# Altium PCB Breakout.PcbDoc
Units mil, origin at the board's own origin, x right, y up, seen from the top; angles counter-clockwise.
Board outline 1380 x 2410 mil, 2 copper layers (Top Layer, Bottom Layer); 51 components, 48 nets, 259 pads, 19 vias.
Unrouted connection lines stored in the file: 30.
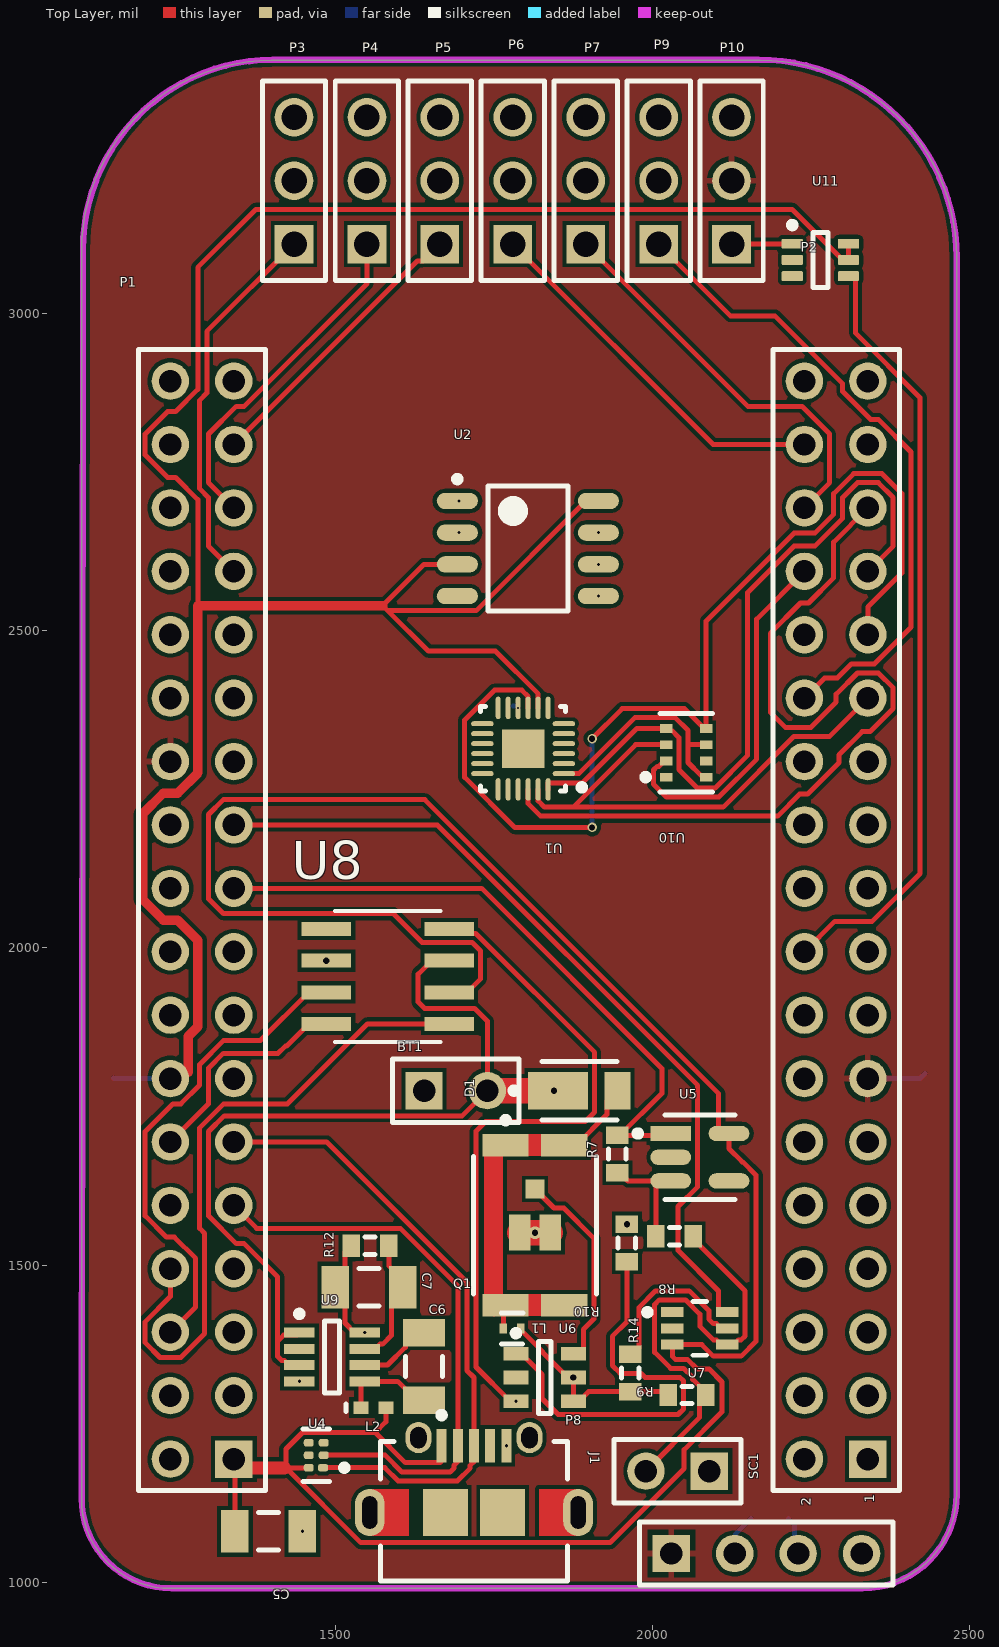
[diagram p0: Top Layer view]
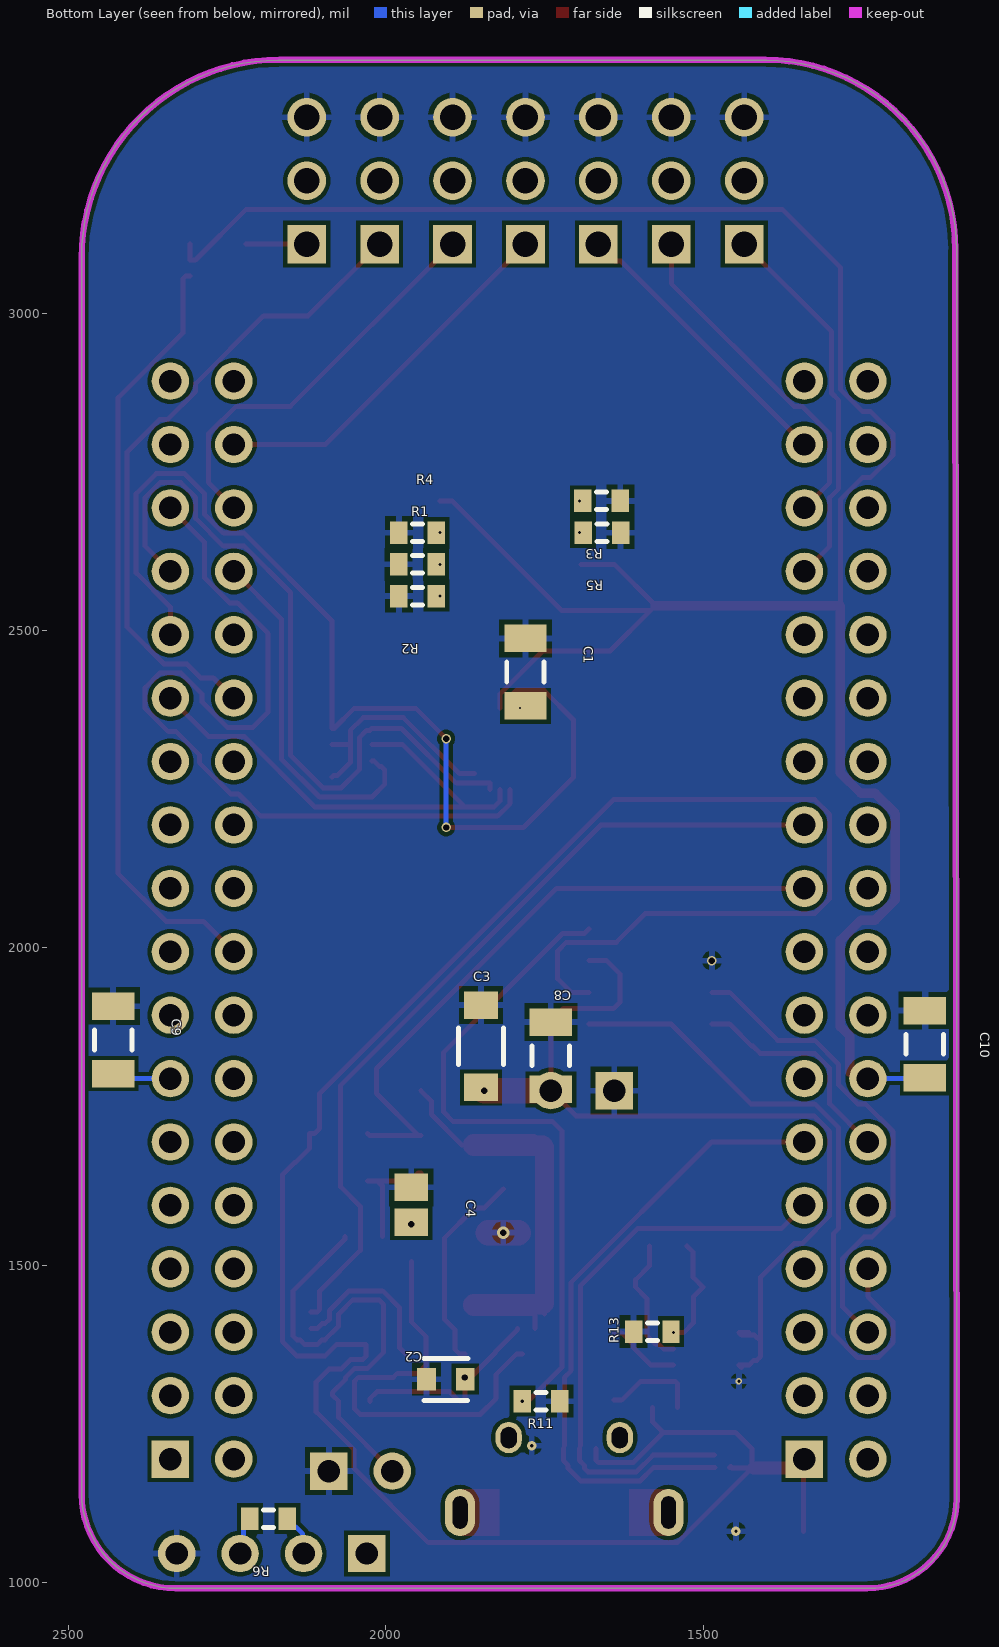
[diagram p1: Bottom Layer view, seen from below]

## Layer stack, top to bottom
Top Solder: solder mask 0.4, Solder Resist, Dk 3.5
Top Layer: signal copper 1.4
Dielectric 1: dielectric 12.6, FR-4, Dk 4.8
Bottom Layer: signal copper 1.4
Bottom Solder: solder mask 0.4, Solder Resist, Dk 3.5

## Board outline
1400,3400 2170,3400 cw(c2170,3090) 2480,3090 2480,1140 cw(c2330,1140) 2330,990 1240,990 cw(c1240,1130) 1100,1130 1100,3100 cw(c1400,3100)

## Design rules (kind name [scope] priority, off if disabled: settings)
BoardOutlineClearance BoardOutlineClearance_2 [All] p1: gap=0 ignorepadtopadclearanceinfootprint=FALSE
BoardOutlineClearance BoardOutlineClearance_1 [OnLayer('Bottom Overlay')] p2: gap=0 ignorepadtopadclearanceinfootprint=FALSE
BoardOutlineClearance [OnLayer('Top Overlay')] p3: gap=0 ignorepadtopadclearanceinfootprint=FALSE
Clearance [All] p1: gap=6.3 ignorepadtopadclearanceinfootprint=FALSE
HoleSize [All] p1: absolutevalues=TRUE maxlimit=248.03 minlimit=12.6 maxpercent=80.000 minpercent=20.000
HoleToHoleClearance [All] p1: gap=5.91 allowstackedmicrovias=TRUE
MinimumAnnularRing [All] p1: minimumring=5.91
MinimumSolderMaskSliver [All] p1: minsoldermaskwidth=5.91
PlaneConnect [All] p1: planeconnectstyle=Direct reliefexpansion=20 reliefentries=4 reliefconductorwidth=10 reliefairgap=10
PolygonConnect [All] p1: connectstyle=Relief reliefconductorwidth=9.84 reliefentries=4 polygonreliefangle="90 Angle" airgapwidth=7.87
RoutingVias [All] p1: holewidth=12.6 width=19.68 viastyle="Through Hole" minholewidth=12.6 minwidth=19.68 maxholewidth=248.03 maxwidth=496.06
SMDEntry [All] p1: side=TRUE corner=TRUE anyangle=TRUE
SilkToSilkClearance [All] p1: silktosilkclearance=5.91
SilkToSolderMaskClearance [IsPad] p1: minsilkscreentomaskgap=5.91 clearancetoexposedcopper=TRUE
SolderMaskExpansion [All] p1: expansion=4 istentingtop=FALSE
UnConnectedPin [All] p1:
UnRoutedNet [All] p1: checkbadconnections=TRUE
Width [All] p1: maxlimit=393.7 minlimit=6.3 preferedwidth=7.87
23 further rules are at their usual default settings.

## Classes and differential pairs
component class "5v and Filters": BT1 C5 C6 C7 C8 C9 C10 L2 R12 R13 U9
component class MPPT: C2 C3 C4 D1 L1 Q1 R7 R8 R9 R10 R11 R14 SC1 U5 U6 U7 U8
component class PocketPilot: C1 J1 P1 P2 P3 P4 P5 P6 P7 P8 P9 P10 R1 R2 R3 R4 R5 U1 U2 U4 U10 U11

## Components (designator, comment, footprint, x,y, rotation, side; value= is the part's Value field where it differs from the comment)
BT1 "Battery" BAT-2 1690,1775 r0 top
C1 "Cap Semi" C1206 1780,2435 r270 bottom value=0.1uF
C2 "GRM188R61A106KE69D" FP-GRM18-0_15-MFG 1905.51,1320 r0 bottom value=10uF
C3 "C3216X5R1E476M160AC" FP-C3216-160-MFG 1850,1845 r90 bottom value=47uF
C4 "C0805C221K5RACTU" CAPC2013X88X50LL20T25 1960,1595 r270 bottom
C5 "Cap Semi" C1206 1395,1080 r180 top value=1uF
C6 "Cap Semi" C1206 1640,1340 r270 top value=0.22uF
C7 "Cap Semi" C1206 1553.15,1465 r180 top value=0.22pF
C8 "Cap Semi" C1206 1740,1830 r90 bottom value=2.2uF
C9 "Cap Semi" C1206 2430,1855 r270 bottom value=1uF
C10 "Cap Semi" C1206 1150,1848.15 r270 bottom value=10nF
D1 "DFLS220L-7" FP-PowerDI123-MFG 1885,1775 r180 top value=75pF
J1 "47589-0001" MOLX-47589-0001_V 1718.82,1168.74 r0 top
L1 "LQW04AN33NH00D" FP-LQW04AN_00-MFG 1778.78,1400 r180 top
L2 "Inductor" 0402-A 1560,1275 r0 top value=33uH
P1 "Header 18X2" HDR2X18 1340,1194 r90 top
P2 "Header 18X2" HDR2X18 2340,1194 r90 top
P3 "TSW-103-07-G-S" SMTC-TSW-103-07-X-S 1435,3110 r90 top
P4 "TSW-103-07-G-S" SMTC-TSW-103-07-X-S 1550,3110 r90 top
P5 "TSW-103-07-G-S" SMTC-TSW-103-07-X-S 1665,3110 r90 top
P6 "TSW-103-07-G-S" SMTC-TSW-103-07-X-S 1780,3110 r90 top
P7 "TSW-103-07-G-S" SMTC-TSW-103-07-X-S 1895,3110 r90 top
P8 "Header 4" HDR1X4 2030,1045 r0 top
P9 "TSW-103-07-G-S" SMTC-TSW-103-07-X-S 2010,3110 r90 top
P10 "TSW-103-07-G-S" SMTC-TSW-103-07-X-S 2125,3110 r90 top
Q1 "BSB012N03LX3 G" INF-MG-WDSON-2-8_V 1815,1562.91 r0 top
R1 "Res3" J1-0603 1950.47,2605 r180 bottom value=1.5K
R2 "Res3" J1-0603 1950,2555 r0 bottom value=1.5K
R3 "Res3" J1-0603 1660,2705 r0 bottom value=1K
R4 "Res3" J1-0603 1950,2655 r180 bottom value=1K
R5 "Res3" J1-0603 1659.53,2655 r0 bottom value=1K
R6 "Res3" J1-0603 2185,1100 r0 bottom value=120
R7 "Res3" J1-0603 1945,1675 r90 top value=2.5K
R8 "Res3" J1-0603 2035,1545 r180 top value=7K
R9 "Res3" J1-0603 2055,1295 r180 top value=1
R10 "Res3" J1-0603 1960,1535 r270 top value=147K
R11 "Res3" J1-0603 1755.47,1285.2 r0 bottom value=1K
R12 "Res3" J1-0603 1555,1530 r180 top value=604K
R13 "Res3" J1-0603 1580,1395 r0 bottom value=200K
R14 "Res3" J1-0603 1965,1330 r270 top value=1
SC1 "Solar Cells" BAT-2 2040,1175 r180 top
U1 "MPU-9250" INSE-QFN-24-1700X1540TP_M 1796.38,2314.25 r180 top
U2 "CAT24C32WI-GT3" ONSC-SOIC-8-751BD-01_M 1803.78,2630 r0 top
U4 "TPD4S012DRYR" FP-DRY0006A-MFG 1470,1200 r180 top
U5 "MCP6001T-I/OT" FP-C04-091-OT-IPC_A 2075,1670 r0 top
U6 "LTC1872BES6#TRMPBF" LT-S6-6-TSOT-23_L 1830.28,1322.6 r0 top
U7 "INA214AIDCKT" FP-DCK0006A-MFG 2075,1400 r0 top
U8 "AD8400ARZ1" R_8_ADI 1583,1955 r0 top
U9 "LT3470ITS8" LT-TS8-8-TSOT-23_V 1495,1355 r0 top
U10 "BMP280" FP-BMP280-MFG 2053.5,2307.8 r180 top
U11 "SN74LVC1G57DCKR" DCK0006A_N 2265,3085 r0 top

## Footprints (in the part's own frame and the unit in brackets; to place one, negate y for a bottom-side part, rotate by r counter-clockwise, add the part's x,y. Pads: shape width x height; smd on the part's side, far side on the other; paste and mask are expansions set on the pad)
0402-A [mm] "Chip Inductor, Body 1.0x0.5mm, IPC High Density"
  rect 0.6x0.5 smd: 1(-0.5,0) 2(0.5,0)
  silkscreen extent -1.1,-0.15 -1.1,0.15, body extent -0.55,-0.3 0.55,0.3, height 0.55
BAT-2 [mm] "Battery; 2 Leads"
  rect 1.5x1.5 hole 0.9: 1(-1.27,0)
  round 1.5 hole 0.9: 2(1.27,0)
  silkscreen extent -2.54,-1.27 2.54,1.27
C1206 [mm] "Chip Capacitor, Body 3.2x1.6mm, IPC High Density"
  rect 1.1x1.7 smd: 1(-1.35,0) 2(1.35,0)
  silkscreen extent -0.4,-0.75 0.4,0.75, body extent -1.7,-0.9 1.7,0.9, height 1.3
CAPC2013X88X50LL20T25 [mm] "Chip Capacitor, 2-Leads, Body 2.00x1.25mm, IPC High Density"
  rect 1.1x1.35 smd: 1(-0.7,0) 2(0.7,0)
  body extent -1.1,-0.72 1.1,0.72, height 0.88
DCK0006A_N [mm] "SOT23, 6-Leads, Body 2.15x1.4mm, Pitch 0.65mm, IPC Medium Density"
  rrect25% 0.85x0.4 smd: 1(-1.125,0.65) 2(-1.125,0) 3(-1.125,-0.65) 4(1.125,-0.65) 5(1.125,0) 6(1.125,0.65)
  silkscreen extent -1.25,-1.1 0.3,1.52, body extent -1.14,-1 1.14,1, height 0.94
FP-BMP280-MFG [mm]
  rect 0.5x0.35 smd paste+0 mask+0: 1(0.8,0.975) 2(0.8,0.325) 3(0.8,-0.325) 4(0.8,-0.975) 5(-0.8,-0.975) 6(-0.8,-0.325) 7(-0.8,0.325) 8(-0.8,0.975)
  silkscreen extent -1.05,-1.58 1.75,1.58, body extent -1.55,-1.8 1.55,1.8, height 0.25
FP-C04-091-OT-IPC_A [mil]
  rect 64.5x24.33 smd paste+0 mask+0: 1(-45.91,37.4)
  rrect100% 64.5x24.33 smd paste+0 mask+0: 2(-45.91,0) 3(-45.91,-37.4) 4(45.91,-37.4) 5(45.91,37.4)
  silkscreen extent -103,-67 55,67
FP-C3216-160-MFG [mm]
  rect 1.1x1.35 smd paste+0 mask+0: 1(-1.65,0) 2(1.65,0)
  silkscreen extent -0.72,-0.9 0.72,0.9, body extent -1.6,-0.8 1.6,0.8, height 1.8
FP-DCK0006A-MFG [mm]
  rect 0.9x0.4 smd paste-1000 mask+0: 1(-1.1,0.65) 2(-1.1,0) 3(-1.1,-0.65) 4(1.1,-0.65) 5(1.1,0) 6(1.1,0.65)
  silkscreen extent -2.22,-1.07 0.27,1.07, body extent -1.65,-1.33 1.65,1.33, height 0.25
FP-DRY0006A-MFG [mm]
  rrect67% 0.406x0.3 smd paste-1000 mask-1000: 1(-0.275,0.5)
  rrect67% 0.4x0.3 smd paste-1000 mask-1000: 2(-0.3,0) 3(-0.3,-0.5) 4(0.3,-0.5) 5(0.3,0) 6(0.3,0.5)
  silkscreen extent -1.25,-1.05 0.53,1.05, body extent -0.63,-0.85 0.63,0.85, height 0.25
FP-GRM18-0_15-MFG [mm]
  rect 0.75x0.9 smd paste+0 mask+0: 1(-0.775,0) 2(0.775,0)
  silkscreen extent -0.88,-0.83 0.87,0.85, body extent -0.8,-0.4 0.8,0.4, height 0.95
FP-LQW04AN_00-MFG [mm]
  rect 0.3x0.4 smd paste+0 mask+0: 1(-0.35,0) 2(0.35,0)
  silkscreen extent -0.43,-0.62 0.43,0.63, body extent -0.6,-0.33 0.6,0.33, height 0.25
FP-PowerDI123-MFG [mm]
  rect 2.4x1.5 smd paste+0 mask+0: 1(0.85,0)
  rect 1.05x1.5 smd paste+0 mask+0: 2(-1.525,0)
  silkscreen extent -1.5,-1.17 2.75,1.17, body extent -2.15,-1.06 2.15,1.06, height 0.25
HDR1X4 [mm] "Connector; Header; 4 Position"
  rect 1.5x1.5 hole 0.9: 1(0,0)
  round 1.5 hole 0.9: 2(2.54,0) 3(5.08,0) 4(7.62,0)
  silkscreen extent -1.27,-1.27 8.89,1.27
HDR2X18 [mm] "Connector; Header; 18x2 Position"
  rect 1.5x1.5 hole 0.9: 1(0,0)
  round 1.5 hole 0.9: 2(0,2.54) 3(2.54,0) 4(2.54,2.54) 5(5.08,0) 6(5.08,2.54) 7(7.62,0) 8(7.62,2.54) 9(10.16,0) 10(10.16,2.54) 11(12.7,0) 12(12.7,2.54) 13(15.24,0) 14(15.24,2.54) 15(17.78,0) 16(17.78,2.54) 17(20.32,0) 18(20.32,2.54) 19(22.86,0) 20(22.86,2.54) 21(25.4,0) 22(25.4,2.54) 23(27.94,0) 24(27.94,2.54) 25(30.48,0) 26(30.48,2.54) 27(33.02,0) 28(33.02,2.54) 29(35.56,0) 30(35.56,2.54) 31(38.1,0) 32(38.1,2.54) 33(40.64,0) 34(40.64,2.54) 35(43.18,0) 36(43.18,2.54)
  silkscreen extent -1.27,-1.27 44.45,3.81
INF-MG-WDSON-2-8_V [mm] "WDSON, 7-Leads, Body 5.5x4.93mm"
  rect 1.85x0.9 smd: 1(-1.175,3.205) 2(1.175,3.205) 3(1.175,-3.205) 4(-1.175,-3.205)
  rect 0.75x0.75 smd: 5(0,1.45)
  rect 0.87x1.45 smd: 6(0.61,-0.3) 7(-0.61,-0.3)
  silkscreen extent -2.46,-2.75 2.46,4.33, body extent -2.46,-2.75 2.46,2.75, height 0.68
INSE-QFN-24-1700X1540TP_M [mm] "QFN, 24-Leads, Body 3.1x3.1mm, Pitch 0.40mm, Thermal Pad 1.54x1.70mm, IPC Low Density"
  oval 0.9x0.2 smd: 1(-1.632,1) 2(-1.632,0.6) 3(-1.632,0.2) 4(-1.632,-0.2) 5(-1.632,-0.6) 6(-1.632,-1) 13(1.632,-1) 14(1.632,-0.6) 15(1.632,-0.2) 16(1.632,0.2) 17(1.632,0.6) 18(1.632,1)
  oval 0.2x0.9 smd: 7(-1,-1.632) 8(-0.6,-1.632) 9(-0.2,-1.632) 10(0.2,-1.632) 11(0.6,-1.632) 12(1,-1.632) 19(1,1.632) 20(0.6,1.632) 21(0.2,1.632) 22(-0.2,1.632) 23(-0.6,1.632) 24(-1,1.632)
  rect 1.7x1.54 smd: 25(0,0)
  silkscreen extent -2.48,-1.7 1.7,1.7, body extent -1.55,-1.55 1.55,1.55, height 1.05
J1-0603 [mm] "Chip Resistor, Body 1.6x0.8mm, IPC High Density"
  rect 0.7x0.9 smd: 1(-0.75,0) 2(0.75,0)
  silkscreen extent -0.2,-0.35 0.2,0.35, body extent -0.85,-0.48 0.85,0.48, height 0.9
LT-S6-6-TSOT-23_L [mm] "SOT23, 6-Leads, Body 2.9x1.75mm, Pitch 0.95mm, IPC High Density"
  rect 1x0.55 smd: 1(-1.15,0.95) 2(-1.15,0) 3(-1.15,-0.95) 4(1.15,-0.95) 5(1.15,0) 6(1.15,0.95)
  silkscreen extent -1.27,-1.45 0.25,1.9, body extent -0.87,-1.45 0.87,1.45, height 1
LT-TS8-8-TSOT-23_V [mm] "SOT23, 8-Leads, Body 2.9x1.75mm, Pitch 0.65mm"
  rect 1.22x0.4 smd: 1(-1.31,0.975) 2(-1.31,0.325) 3(-1.31,-0.325) 4(-1.31,-0.975) 5(1.31,-0.975) 6(1.31,-0.325) 7(1.31,0.325) 8(1.31,0.975)
  silkscreen extent -1.43,-1.45 0.3,1.85, body extent -0.87,-1.45 0.88,1.45, height 1
MOLX-47589-0001_V [mm] "SMD, 5-Leads, Body 7.5x5.6mm, Pitch 0.65mm"
  rect 0.4x1.35 smd: 1(-1.3,1.175) 2(-0.65,1.175) 3(0,1.175) 4(0.65,1.175) 5(1.3,1.175)
  oval 1.05x1.25 hole 0.65 slot 0.85 at 90 deg: 6(-2.225,1.5) 7(2.225,1.5)
  oval 1.2x1.9 hole 0.6 slot 1.3 at 90 deg: 8(-4.175,-1.5) 11(4.175,-1.5)
  rect 1.8x1.9 smd: 9(-1.15,-1.5) 10(1.15,-1.5)
  Top Layer region: 2.6,-2.45 4.175,-2.45 4.175,-0.55 2.6,-0.55
  Top Layer region: -2.6,-0.55 -4.175,-0.55 -4.175,-2.45 -2.6,-2.45
  silkscreen extent -3.75,-4.25 3.75,2.52, body extent -4.32,-4.25 4.32,1.64, height 2.74
ONSC-SOIC-8-751BD-01_M [mm] "SOIC, 8-Leads, Body 4.90x3.90mm, Pitch 1.27mm, IPC Low Density"
  oval 1.65x0.65 smd: 1(-2.825,1.905) 2(-2.825,0.635) 3(-2.825,-0.635) 4(-2.825,-1.905) 5(2.825,-1.905) 6(2.825,-0.635) 7(2.825,0.635) 8(2.825,1.905)
  silkscreen extent -2.95,-2.5 1.6,2.9, body extent -3,-2.5 3,2.5, height 1.75
R_8_ADI [mil]
  rect 78x22 smd paste+0 mask+0: 1(-97,75) 2(-97,25) 3(-97,-25) 4(-97,-75) 5(97,-75) 6(97,-25) 7(97,25) 8(97,75)
  silkscreen extent -84,-104 84,104, body extent -122,-98 122,99, height 69
SMTC-TSW-103-07-X-S [mm] ".025 SQ Post Terminal Strip Assembly, 1x3 Pins, Vertical, 2.54mm Pitch, Male"
  rect 1.55x1.55 hole 1.02: 1(0,0)
  round 1.55 hole 1.02: 2(2.54,0) 3(5.08,0)
  silkscreen extent -1.46,-1.27 6.54,1.27, body extent -1.27,-1.27 6.35,1.27, height 8.38

## Part data
BT1: "Multicell Battery", LatestRevisionDate=17-Jul-2002, LatestRevisionNote="Re-released for DXP Platform.", PackageDescription="Battery; 2 Leads", PackageReference=BAT-2, Published=24-Mar-1999, Publisher="Altium Limited"
C1 C5 C6 C7 C8 C9 C10: "Capacitor (Semiconductor SIM Model)", LatestRevisionDate=29-May-2009, LatestRevisionNote="IPC-7351 Footprint Added.", PackageDescription="Chip Capacitor", PackageReference=C1206, Published=8-Jun-2000, Publisher="Altium Limited"
C2: library part CMP-2000-05448-2, "CAP CER 10UF 10V X5R 0603", Capacitance=10uF, Manufacturer=Murata, Package=GRM18-0.15, Temperature="-55°C to +85°C", Temperature Characteristic=X5R, Temperature Coefficient=15%, Temperature Range High=+85°C, Temperature Range Low=-55°C, Tolerance=10%, Voltage Rating=10V, Automotive=No, Category=Cap, ComponentLink2Description=Datasheet, ComponentLink2URL=https://search.murata.co.jp/Ceramy/image/img/A01X/G101/ENG/GRM188R61A106KE69-01A.pdf, Device Class L1="Passive Components", Device Class L2=Capacitors, Device Class L3="Ceramic Capacitors", Digikey Description="CAP CER 10UF 10V X5R 0603", Height=0.95mm, Lead Free=Yes, Manufacturer Part Number=GRM188R61A106KE69D, Material=Ceramic, Mouser Description="Multilayer Ceramic Capacitors MLCC - SMD/SMT 0603 10uF 10volts X5R + - 10%", Octopart=https://octopart.com/grm188r61a106ke69d-murata-22851381, RoHS=TRUE
C3: library part CMP-2000-05397-2, "CAP CER 47UF 25V X5R 1206", 3DS Part Number=220-00004, Capacitance=47uF, Manufacturer=TDK, Package=C3216-160, Temperature="-55°C to +85°C", Temperature Characteristic=X5R, Temperature Coefficient=15%, Temperature Range High=+85°C, Temperature Range Low=-55°C, Tolerance=20%, Voltage=25V, Automotive=No, Category=Cap, ComponentLink2Description=Datasheet, ComponentLink2URL=https://product.tdk.com/info/en/catalog/datasheets/mlcc_commercial_general_en.pdf, Device Class L1="Passive Components", Device Class L2=Capacitors, Device Class L3="Ceramic Capacitors", Digikey Description="CAP CER 47UF 25V X5R 1206", Footprint Url=https://product.tdk.com/info/en/catalog/spec/mlccspec_commercial_general_midvoltage_en.pdf, Height=1.8mm, Ipc Land Pattern Name=CAPC320160X160, Lead Free=Yes, Manufacturer Part Number=C3216X5R1E476M160AC, Material=Ceramic, Mouser Description="Multilayer Ceramic Capacitors MLCC - SMD/SMT 1206 47uF 25volts X5R 20%", Octopart=https://octopart.com/c3216x5r1e476m160ac-tdk-25947783, RoHS=TRUE, Voltage Rating=25V
C4: library part CMP-2007-00321-1, Manufacturer=Kemet, Part Number=C0805C221K5RACTU
D1: library part CMP-12790-000030-1, "DIODE SCHOTTKY 20V 2A POWERDI123", Capacitance=75pF, Forward Current=2A, Manufacturer="Diodes Inc.", Max Junction Temp=+125°C, Max Repetitive Reverse Voltage=20V, Max Surge Forward Current=40A, Package=PowerDI123, Peak Reverse Current=1mA, Temperature="-55°C to +125°C", Temperature Range Low=-55°C, Automotive=No, Category=Diode, ComponentLink2Description=Datasheet, ComponentLink2URL=https://www.diodes.com/assets/Datasheets/ds30517.pdf, Device Class L1="Discrete Semiconductors", Device Class L2=Diodes, Device Class L3="Schottky Diodes", Digikey Description="DIODE SCHOTTKY 20V 2A POWERDI123", Footprint Url=https://www.diodes.com/assets/Package-Files/PowerDI123.pdf, Height=1mm, Lead Free=Yes, Manufacturer Part Number=DFLS220L-7, Mouser Description="DFLS220L Series 20 V 2 A Surface Mount Schottky Barrier Rectifier - PowerDI-123", Octopart=https://octopart.com/dfls220l-7-diodes+inc.-328575, Reverse Voltage=20V, RoHS=TRUE, Temperature Range High=+125°C
J1: library part CMP-2000-05610-1, "Right Angle Female Type AB Micro USB Connector, 30 V, 1.8 A, -30 to 85 degC, RoHS, Tape and Reel", Color=Black, Current Rating=1.8A, Manufacturer=Molex, Operating Temperature Range=-20Cto+85C, Package Description="Micro USB Connector, Pitch 0.65 mm, 5 Positions, Body 7.5 x 5.6 mm", Voltage Rating=30VAC, Brand=Molex, Connector Type=MicroUSBTypeABreceptacle, Contact Material=CopperAlloy, Contact Plating=Gold, Datasheet URL=http://www.molex.com/webdocs/datasheets/pdf/en-us/0475890001_IO_CONNECTORS.pdf, Datasheet Version=12/2016, Gender=Female, Manufacturer URL=http://www.molex.com/, Mounting Angle=Right, Mounting Technology=SurfaceMount, Number of Contacts=5Contact, Number of Ports=1Port, Package Reference=47589-0001, Package URL=http://www.molex.com/pdm_docs/sd/475890001_sd.pdf, Packaging=Reel, Product=MicroUSBTypeABConnectors, Product Category=USBConnectors, RoHS=True, Series=47589, Standard=USB, Termination Style=SMD/SMT
L1: library part CMP-06042-000403-1, "Wire Wound RF Inductor 33nH ±3% 140mA 1.11Ω 03015 (0804)", Case Code (Imperial)=3015, Case Code (Metric)=0804, Case/Package=Nonstandard, Current Rating=140mA, DC Resistance (DCR)=1.11R, Inductance=33nH, Max Operating Temperature=125°C, Min Operating Temperature=-55°C, Package Quantity=10000, Self Resonant Frequency=4GHz, Test Frequency=100MHz, Tolerance=3%, Core Material=Ferrite, DC Current=140mA, Depth=0.45mm, Height=0.4mm, Height - Seated (Max)=0.018inch, Lead Free="Lead Free", Length=0.8mm, Max DC Current=140mA, Military Standard=Not, Mount="Surface Mount", Packaging="Tape and Reel", Q Factor=15, Shielding=Unshielded, Termination=SMD/SMT, Weight=1.1E-05oz, Width=0.016inch
P1 P2: "Header, 18-Pin, Dual row", LatestRevisionDate=17-Jul-2002, LatestRevisionNote="Re-released for DXP Platform.", Publisher="Altium Limited"
P3 P4 P5 P6 P7 P9 P10: library part CMP-1024-00333-1, "0.025\" SQ Post Header, Through-hole, Vertical, -55 to 125 degC, 2.54 mm Pitch, 3-Pin, Male, RoHS", Manufacturer=Samtec, Temperature Range="-55 to 125 degC", ComponentLink1Description="Manufacturer URL", ComponentLink1URL=http://www.samtec.com, ComponentLink2Description=Datasheet, ComponentLink2URL=http://www.samtec.com/documents/webfiles/pdf/TSW_TH.PDF, ComponentLink3Description="Package Specification", ComponentLink3URL=http://www.samtec.com/documents/webfiles/cpdf/TSW-XXX-XX-XXX-X-XX-XXX-MKT.pdf, DatasheetVersion=F-214, Mounting Technology=Through-hole, Orientation=Vertical, PackageDescription=".025[0.64] SQ. Post Terminal Strip Assembly", PackageReference=TSW-103-07-X-S, PackageVersion="DM, 8/1988", PartNumber=TSW-103-07-G-S, Pitch="2.54 mm", RoHS=True
P8: "Header, 4-Pin", LatestRevisionDate=17-Jul-2002, LatestRevisionNote="Re-released for DXP Platform.", Publisher="Altium Limited"
Q1: library part CMP-1090-00012-1, "N-Channel OptiMOS 3 Power-MOSFET, 30 V VDS, 180 A ID, -40 to 150 degC, MG-WDSON-2-8, Reel, Green", Manufacturer=Infineon, ComponentLink1Description="Manufacturer URL", ComponentLink1URL=http://www.infineon.com/, ComponentLink2Description=Datasheet, ComponentLink2URL=http://www.infineon.com/dgdl/BSB012N03LX3+G_Rev_+2.1_pdf.pdf?folderId=db3a304313b8b5a60113cee8763b02d7&fileId=db3a304320d39d590121a0112ce07a8b, ComponentLink3Description="Package Specification", ComponentLink3URL=http://www.infineon.com/dgdl/MG-WDSON-2-MX-Package_Overview.pdf?folderId=db3a30431f848401011fb8316d98599f&fileId=db3a30431f848401011fb8a9e1645a0a, DatasheetVersion="Rev. 2.1", Green=TRUE, Halogen-free=TRUE, ID (max)="180Â A", IDpuls (max)="400Â A", Mounting Technology="Surface Mount", PackageDescription="7-Pin Metal Green Very Very Thin Profile Dual Small Outline Non-leaded Package", PackageReference=MG-WDSON-2-8, PackageVersion=Jun-09, Packing=Reel, PartNumber="BSB012N03LX3 G", Polarity=N, Ptot (max)="89Â W", QG="127Â nC", RDS (on) (max)="1.2Â mOhm", RDS (on) (max) (@4.5V)="1.8Â mOhm", Rth="1.4Â K/W", RthJA (max)="45 K/W", RthJC (max)="1.4 K/W", VDS (max)="30Â V", VGS(th) (max)="2.2Â V", VGS(th) (min)="1Â V"
R1 R2 R3 R4 R5 R6 R7 R8 R9 R10 R11 R12 R13 R14: "Resistor", LatestRevisionDate=29-May-2009, LatestRevisionNote="IPC-7351 Footprint Added.", PackageDescription="Chip Resistor", PackageReference=J1-0603, Published=8-Jun-2000, Publisher="Altium Limited"
SC1: library part Battery, "Multicell Battery", LatestRevisionDate=17-Jul-2002, LatestRevisionNote="Re-released for DXP Platform.", PackageDescription="Battery; 2 Leads", PackageReference=BAT-2, Published=24-Mar-1999, Publisher="Altium Limited"
U1: library part CMP-2100-03657-1, "9-axis MotionTracking device, 2.4 to 3,6 V, -40 to 85 degC, 24-Pin QFN, RoHS, Tape and Reel", Case/Package=QFN, Manufacturer=InvenSense, Max Operating Temperature=85degC, Max Supply Voltage=3.6V, Min Operating Temperature=-40degC, Min Supply Voltage=2.4V, Package Description="24-Pin Quad Flat No-lead Package, Body 3 x 3 mm, Pitch 0.4 mm", Package Quantity=1, Package Reference=QFN-24, Datasheet URL=http://datasheet.octopart.com/MPU-9250-InvenSense-datasheet-21859386.pdf, Datasheet Version="Rev. 1.0, 01/2014", Height=1mm, Length=3.1mm, Manufacturer URL=http://www.invensense.com/, Mount=SurfaceMount, RoHSCompliant=true, Width=3.1mm
U2: library part CMP-1679-00009-1, "I2C CMOS Serial EEPROM, 32 Kb, 1.7 to 5.5 V, -40 to 85 degC, 8-Pin SOIC (751BD), RoHS, Tape and Reel", Case\Package=TO-226-3, Frequency="300 MHz", Max Operating Temperature="150 degC", Max Power Dissipation="625 mW", Min Operating Temperature="-55 degC", Package Quantity=1000, ComponentLink1Description="Manufacturer URL", ComponentLink1URL=http://www.onsemi.com/, ComponentLink2Description=Datasheet, ComponentLink2URL=http://www.onsemi.com/pub_link/Collateral/CAT24C32-D.PDF, ComponentLink3Description="Package Specification", ComponentLink3URL=http://www.onsemi.com/pub_link/Collateral/751BD.PDF, DatasheetVersion="Rev. 24, 06/2015", Elements=1, Height="5.33 mm", hFE Min=100, Length="5.2 mm", Mount="Through Hole", PackageDescription="8-Pin Small Outline Integrated Circuit, Body 4.9 x 3.9 mm, Pitch 1.27 mm", PackageReference=SOIC-8-751BD-01, Packaging=Bulk, Pins=3, Radiation Hardening=No, REACH SVHC="No SVHC", RoHSCompliant=true, Vce Max="1 V", Weight="0.006314 oz", Width="4.19 mm"
U4: library part CMP-0326-00038-4, "TVS DIODE 5.5V 6SON", Breakdown Voltage=24V, Capacitance=15pF, Max Operating Temperature=85°C, Max Power Dissipation=60W, Min Breakdown Voltage=6V, Min Operating Temperature=-40°C, Operating Supply Voltage=950mV, Package Quantity=5000, Peak Pulse Current=3A, Test Current=1mA, Working Voltage=19V, Depth=1mm, Direction=Unidirectional, ESD Protection=Yes, Height=0.55mm, Interface=USB, Lead Free="Lead Free", Length=1.45mm, Number of Channels=4, Number of Circuits=4, Number of Pins=6, Packaging="Tape and Reel", Peak Pulse Power=60W, Polarity=Unidirectional, Radiation Hardening=No, REACH SVHC="No SVHC", Termination=SMD/SMT, Width=1.05mm
U5: library part CMP-0187-00462-3, "IC OPAMP GP 1 CIRCUIT SOT23-5", Case/Package=SOT-23, Input Bias Current=1pA, Input Offset Voltage (Vos)=4.5mV, Max Operating Temperature=85°C, Max Supply Voltage=6V, Min Operating Temperature=-40°C, Min Supply Voltage=1.8V, Nominal Supply Current=100uA, Operating Supply Voltage=5.5V, Output Current=23mA, Package Quantity=1, Power Supply Rejection Ratio (PSRR)=86dB, Voltage Gain=112dB, Bandwidth=1MHz, Common Mode Rejection Ratio=60dB, Contact Plating=Tin, Gain Bandwidth Product=1MHz, Height=1.3mm, Lead Free="Lead Free", Length=3.1mm, Mount="Surface Mount", Number of Amplifiers=1, Number of Channels=1, Number of Circuits=1, Number of Elements=1, Number of Pins=5, Operating Supply Current=100uA, Output Current per Channel=23mA, Packaging="Tape and Reel", Radiation Hardening=No, REACH SVHC="No SVHC", Slew Rate=0.6V/µs, Unity Gain Bandwidth Product=1MHz, Voltage=6V, Width=1.8mm
U6: library part CMP-0492-01790-1, "Constant Frequency Current Mode Step-Up DC/DC Controller, 6-pin SOT23 (S6-6), -40 to 85 degC, Pb-Free, Mini Tape and Reel", Manufacturer="Linear Technology", Code_JEDEC=MO-193, ComponentLink1Description="Manufacturer URL", ComponentLink1URL=http://www.linear.com/, ComponentLink2Description=Datasheet, ComponentLink2URL=http://cds.linear.com/docs/en/datasheet/1872bf.pdf, ComponentLink3Description="Package Specification", ComponentLink3URL=http://cds.linear.com/docs/en/packaging/SOT_6_05-08-1636.pdf, Mounting Technology="Surface Mount", Number of Outputs=1, PackageDescription="6-Pin Plastic TSOT-23, Body 2.9 x 1.63 mm, Pitch 0.95 mm", PackageReference=S6-6, PackageVersion=Jun-10, Packing="Mini Tape and Reel", PartNumber=LTC1872BES6#TRMPBF, RoHS=TRUE
U7: library part CMP-2000-06456-2, "IC CURR SENSE 1 CIRCUIT SC70-6", Ambient Temperature Range High=+125°C, Ambient Temperature Range Low=-40°C, Input Bias Current=28uA, Input Offset Voltage=0.001mV, Manufacturer="Texas Instruments", Max Junction Temp=+150°C, Max Supply Voltage=26V, Min Supply Voltage=2.7V, Nominal Supply Current=65uA, Package=DCK0006A, Temperature="-40°C to +125°C", Voltage Gain=0.1V/mV, Automotive=No, Bandwidth=30kHz, Category=IC, ComponentLink2Description=Datasheet, ComponentLink2URL=http://www.ti.com/lit/ds/symlink/ina214.pdf, Device Class L1="Integrated Circuits (ICs)", Device Class L2="Linear ICs", Device Class L3=Instrumentation, Digikey Description="IC CURR SENSE 1 CIRCUIT SC70-6", Height=1.1mm, Lead Free=Yes, Manufacturer Part Number=INA214AIDCKT, Mouser Description="Current Sense Amplifiers Hi/Lo-Side Bi-Dir 0- Drift Ser Crnt Shunt", Number of Channels=1, Octopart=https://octopart.com/ina214aidckt-texas+instruments-7830703, RoHS=TRUE, Standoff Height=0mm, Temperature Range High=+125°C, Temperature Range Low=-40°C
U8: "No Description Available", Built_By=EMA_UL_Team, Copyright="Copyright (C) 2018 Accelerated Designs. All rights reserved", Manufacturer_Part_Number=AD8400ARZ1, RefDes=RefDes, SourceLibrary=Analog_2012-01-01_5, Type=DEV, Vendor="Analog Devices Inc"
U9: library part CMP-0491-02134-1, "Micropower Buck Regulator with Integrated Boost and Catch Diode, 8-pin SOT23 (TS8-8), -40 to 125 degC", Manufacturer="Linear Technology", Code_JEDEC=MO-193, ComponentLink1Description="Manufacturer URL", ComponentLink1URL=http://www.linear.com/, ComponentLink2Description=Datasheet, ComponentLink2URL=http://cds.linear.com/docs/en/datasheet/3470fd.pdf, ComponentLink3Description="Package Specification", ComponentLink3URL=http://cds.linear.com/docs/en/packaging/SOT_8_05-08-1637.pdf, DatasheetVersion="Rev. D", Mounting Technology="Surface Mount", Number of Outputs=1, PackageDescription="8-Pin Plastic TSOT-23, Body 2.9 x 1.63 mm, Pitch 0.65 mm", PackageReference=TS8-8, PackageVersion="Rev. A, 08/2010", PartNumber=LT3470ITS8, RoHS=FALSE
U10: library part CMP-2000-05076-3, "SENSOR PRESSURE ABS", Case/Package=SMD/SMT, Max Operating Temperature=85°C, Min Operating Temperature=-40°C, Operating Pressure=15.95PSI, Lead Free="Lead Free", Max Pressure=290.08PSI, Number of Pins=8, Output Type=SPI, Port Style="No Port", Pressure Type=Absolute, Termination=SMD/SMT
U11: library part CMP-0859-00501-3, "CONFIGURABLE MULTIPLE-FUNCTION GATE, DCK0006A, LARGE T&R", F @ Nom Voltage(Max)(Mhz)=150, Generic Part Number=SN74LVC1G57, ICC @ Nom Voltage(Max)(mA)=0.01, Manufacturer="Texas Instruments", Operating Temperature Range(C)="-40 to 125", Rating=Catalog, tpd @ Nom Voltage(Max)(ns)=14.4,8.3,6.3,5.1, Voltage(Nom)(V)=1.8,2.5,3.3,5, 3-State Output=No, Bits(#)=1, DatasheetVersion=SCES414O, Gate Type=Configurable, Input Type=CMOS/TTL, Logic=True, Output Drive (IOL/IOH)(Max)(mA)=32/-32, Output Type=CMOS, PackageReference=DCK0006A, Schmitt Trigger=No, Sub-Family="Configurable Logic", Technology Family=LVC, VCC(Max)(V)=5.5, VCC(Min)(V)=1.65
L2: Code_IEC=1005, Code_JEITA=0402, LatestRevisionDate=29-May-2009, LatestRevisionNote="IPC-7351 Footprint Added.", PackageDescription="Chip Inductor", PackageReference=0402-A, Published=8-Jun-2000, Publisher="Altium Limited"

## Via types
v1: diameter 15, hole 5, Top Layer to Bottom Layer, 8 vias
v2: diameter 15, hole 10, Top Layer to Bottom Layer, 5 vias
v3: diameter 10, hole 5, Top Layer to Bottom Layer, 3 vias
v4: diameter 20, hole 10, Top Layer to Bottom Layer, 2 vias
v5: diameter 8, hole 3, Top Layer to Bottom Layer, 1 vias

## Nets (pads, with @x,y where several pads share a name; then routed paths per layer and width w, separated by ;. In a path a pad name is that pad's centre, name@x,y a point inside that pad or via, vN(x,y) a via of type N, cw(c..) or ccw(c..) an arc to the next point about the centre after c; other vN are vias at no path point)
3.3v: C10.2 P1.14 U1.1 U1.8 U2.3 U2.8 U10.6 U10.8 U11.5 U11.6 | length 4230.1
  Top Layer w7.87: P1.14@1259,1794 1259,1799.15 1263.64,1803.79 1268.33,1803.79 ; 1283.33,2540 1283.33,2706.91 1248.02,2742.22 1235.55,2742.22 1200.24,2777.53 1200.24,2810.47 1235.55,2845.78 1248.02,2845.78 1283.33,2881.09 1283.33,3073.33 1375,3165 2220.43,3165 2300.43,3085 U11.5 U11.6 ; U2.3 1640,2605 1575,2540 1583.03,2531.97 ; U1.8 1820,2400.88 1752.59,2468.29 1646.71,2468.29 1583.03,2531.97 ; U1.1 1884.15,2274.88 1972.57,2363.31 2036.09,2363.31 2056.26,2343.14 2056.26,2317.83 ; U2.8 1895.32,2705 1722.28,2531.97 1583.03,2531.97 ; U10.8 2082.05,2272.36 2076.43,2272.36 2056.26,2292.53 2056.26,2317.83 ; U10.6 2059.02,2320.59 2056.26,2317.83
  Top Layer w15: P1.14 P1.14@1259,1794 ; 1268.33,1803.79 1268.33,1861.05 1283.33,1876.05 1283.33,2011.95 1251.27,2044 1228.73,2044 1196.67,2076.05 1196.67,2211.95 1228.73,2244 1251.27,2244 1283.33,2276.05 1283.33,2540 1575,2540
  Bottom Layer w7.87: C10.2 1151,1794 P1.14
CanH: P8.2 R6.1 | length 65.6
  Bottom Layer w7.87: P8.2 2131.46,1046.46 2131.46,1075.98 R6.1
CanL: P8.3 R6.2 | length 61.4
  Bottom Layer w7.87: R6.2 2224.37,1090.16 2224.37,1050.63 P8.3
CanRX: P2.9
CanTX: P2.11
CHARGE: BT1.2 C3.1 C8.1 D1.1 U8.7 U9.1 U9.3 | length 1424.2
  Top Layer w7.87: U9.1@1427.28,1393.39 U9.1 1439.49,1389.45 1418.71,1389.45 1409.17,1379.91 ; U9.3@1439.49,1338.27 U9.3 1427.28,1342.2 1419.8,1349.69 1415.17,1349.69 1409.17,1355.68 1409.17,1379.91 ; U8.7 1652,1980 1630.76,1958.76 1630.76,1914.76 1641.01,1904.51 1719.96,1904.51 1740,1884.48 v1(1740,1778.15) BT1.2 1700.24,1735.24 1325,1735.24 1300.24,1710.47 1300.24,1577.53 1344,1533.76 1356.47,1533.76 1409.17,1481.06 1409.17,1379.91 ; v4(1845,1774.96) v4(1845,1774.96)
  Top Layer w40: BT1.2 v4(1845,1774.96)
  Bottom Layer w7.87: v1(1740,1778.15) BT1.2@1740,1781.85 ; v4(1845,1774.96) C3.1 C3.1
GND: BT1.1 C1.1 C2.2 C3.2 C4.1 C5.1 C8.2 C9.1 C10.1 J1.5 P3.3 P4.3 P5.3 P6.3 P7.3 P8.4 P9.3 P10.3 Q1.6 Q1.7 R1.1 R2.2 R3.1 R4.1 R5.1 R11.1 R13.2 SC1.1 U1.11 U1.18 U1.20 U2.4 U4.4 U5.2 U5.4 U6.2 U7.1 U7.2 U8.2 U9.4 U10.1 U10.7 U11.2 U11.3 | length 240.2
  Top Layer w40: Q1.7 Q1.6 ; v4(1815,1551.1) Q1.6 ; v4(1815,1551.1) Q1.6 ; v4(1815,1551.1) Q1.6 ; v4(1815,1551.1) Q1.6 ; v4(1815,1551.1) Q1.6 ; v4(1815,1551.1) Q1.6 ; v4(1815,1551.1) Q1.6 ; v4(1815,1551.1) Q1.6
  other v1: 1448.15,1080 1770,1215
  other v2: 1486,1980
  other v3: 1443.43,1316.61
IN-MPPT: R8.1 R9.1 SC1.2 U7.4 | length 729.8
  Top Layer w7.87: SC1.2 2074.68,1259.73 2074.68,1285.16 R9.1 2084.53,1298.94 2063.66,1319.8 2063.66,1322.83 2049.36,1337.13 2028.91,1337.13 2003.74,1362.3 2003.74,1437.7 2011.04,1445 2052.35,1445 2075,1422.35 2075,1403.24 2096.35,1381.89 2100.98,1381.89 2108.46,1374.41 U7.4 2128.15,1374.41 2135.63,1381.89 2140.26,1381.89 2146.26,1387.89 2146.26,1459.33 2064.53,1541.06 R8.1
MPPT-I: P1.21 U7.6 | length 1310.3
  Top Layer w7.87: P1.21 1661,2194 2071.57,1783.43 2071.57,1623.32 2040.51,1592.26 2040.51,1523.04 2104.53,1459.03 2104.53,1429.53 2108.46,1425.59 U7.6
MPPT-V: P1.19 R7.2 U5.1 | length 1010.7
  Top Layer w7.87: P1.19 1731,2094 2015,1810 2015,1770.59 R7.2@1948.94,1704.53 ; R7.2 R7.2@1948.94,1704.53 ; U5.1 2026.21,1704.53 R7.2@1948.94,1704.53
NetC1_2: C1.2 U1.10 | length 9.8
  Bottom Layer w7.87: C1.2 1785.09,2381.85 v5(1788.44,2378.5)
NetC2_1: C2.1 L1.1 R9.2 R14.2 U6.4 U6.5 | length 319.3
  Top Layer w7.87: L1.1 1792.56,1398.03 1827.17,1363.43 1827.17,1362.13 1866.69,1322.6 v2(1875.55,1322.6) U6.4 1884.41,1285.2 1899.68,1300.47 R14.2 2013.94,1300.47 2025.47,1288.94 R9.2@2025.47,1285
NetC4_2: C4.2 R10.1
  other v2: 1960,1564.53
NetC6_1: C6.1 U9.6 | length 117.5
  Top Layer w7.87: U9.6 1582.4,1342.2 1610.47,1370.28 1610.47,1375.43 1628.19,1393.15 C6.1
NetC6_2: C6.2 L2.1 U9.5 | length 151.3
  Top Layer w7.87: L2.1 1540.32,1312.68 1544.25,1316.61 U9.5 1598.43,1316.61 1628.19,1286.85 C6.2
NetC7_1: C7.1 R12.1 U9.7 | length 208.1
  Top Layer w7.87: U9.7 1562.72,1367.8 1570.2,1375.28 1574.83,1375.28 1588.58,1389.03 1588.58,1447.28 C7.1 1606.3,1476.81 1584.53,1498.58 R12.1
NetC7_2: C7.2 R12.2 R13.1 U9.8 | length 175.9
  Top Layer w7.87: R12.2 1515.63,1520.16 1515.63,1480.63 C7.2 1515.36,1449.64 1515.36,1408.46 1530.43,1393.39 v3(1546.57,1393.39)
NetD1_2: D1.2 L1.2 Q1.1 Q1.2 Q1.3 Q1.4 | length 691.1
  Top Layer w7.87: Q1.1@1745,1675.31 1758.78,1689.09 Q1.1 ; Q1.4@1750,1422.95 1763.78,1436.73 Q1.4 1765,1432.99 L1.2 ; Q1.2 1879.96,1689.09 1928.31,1737.44 1928.31,1758.27 D1.2
  Top Layer w30: Q1.4@1763.78,1436.73 1752.4,1436.73 1749.69,1439.45 1749.69,1686.38 1752.4,1689.09 Q1.1
  Top Layer w35: Q1.4 Q1.3 ; Q1.1 Q1.2
NetQ1_5: Q1.5 U6.6 | length 326
  Top Layer w7.87: Q1.5 1845.12,1589.88 1860.38,1589.88 1907.91,1542.35 1907.91,1414.78 1891.3,1398.16 1891.3,1366.89 1884.41,1360 U6.6
NetR1_2: R1.2 U2.6
  other v1: 1915,2605
NetR2_1: R2.1 U2.5
  other v1: 1915,2555
NetR3_2: R3.2 U2.1
  other v1: 1695,2705
NetR4_2: R4.2 U2.7
  other v1: 1915,2655
NetR5_2: R5.2 U2.2
  other v1: 1695,2655
NetR7_1: R7.1 R8.2 U5.3 | length 180.3
  Top Layer w7.87: R7.1 1948.94,1645.47 1961.81,1632.6 U5.3@2013.45,1632.6 ; R8.2 2005.47,1624.62 U5.3@2013.45,1632.6 ; U5.3 U5.3@2013.45,1632.6
NetR10_2: R10.2 U6.1 | length 670.2
  Top Layer w7.87: U6.1 1793.86,1360 1826.19,1327.67 1826.19,1289.57 1851.63,1264.13 2040.58,1264.13 2049.49,1273.04 2049.49,1316.96 2043.49,1322.95 1988.49,1322.95 1982.21,1329.23 1949.32,1329.23 1937.05,1341.51 1937.05,1387.55 1960,1410.5 R10.2
NetR11_2: R11.2 U6.3 U8.8 | length 1060.4
  Top Layer w7.87: U8.8 1687.06,2022.94 1721.58,2022.94 1909.02,1835.5 1909.02,1741.23 1893.93,1726.14 1737.18,1726.14 1722.09,1711.05 1722.09,1339.25 1776.14,1285.2 v3(1785,1285.2)
NetR14_1: R14.1 U7.5 | length 264.2
  Top Layer w7.87: R14.1 1968.94,1359.53 1978.78,1369.37 1978.78,1432.79 2005.17,1459.17 2058.22,1459.17 2089.17,1428.22 2089.17,1414.66 2096.35,1407.48 2100.98,1407.48 2108.46,1400 U7.5
PRU0.1: P1.33 P5.1 | length 455.9
  Top Layer w7.87: P1.33 1629.51,3083.51 1638.51,3083.51 P5.1
PRU0.2: P2.32 P7.1 | length 641.8
  Top Layer w7.87: P7.1 2150.76,2854.24 2236,2854.24 2279.76,2810.47 2279.76,2733.76 P2.32
PRU0.4: P1.31 P4.1 | length 543.2
  Top Layer w7.87: P1.31 1300.24,2733.76 1300.24,2810.47 1344,2854.24 1356.47,2854.24 1550,3047.77 P4.1
PRU0.5: P2.34 P6.1 | length 590.9
  Top Layer w7.87: P6.1 2096,2794 P2.34
PRU0.6: P2.26 P9.1 | length 1031.9
  Top Layer w7.87: P9.1 2123.05,2996.95 2193.29,2996.95 2300.24,2890 2300.24,2877.53 2344,2833.76 2356.47,2833.76 2408.11,2782.12 2408.11,2505.88 2350.17,2447.94 2313.98,2447.94 2291.91,2425.86 2271.86,2425.86 P2.26
PRU0.7: P1.29 P3.1 | length 600
  Top Layer w7.87: P1.29 1300.24,2633.76 1300.24,2710.04 1286.06,2724.22 1286.06,2863.78 1297.5,2875.22 1297.5,2972.5 P3.1
PRU.ECAP: P2.18 U11.4 | length 1226.3
  Top Layer w7.87: P2.18 2287.9,2041.9 2346.9,2041.9 2422.28,2117.28 2422.28,2867.95 2320.12,2970.12 2320.12,3055.47 2316.18,3059.41 U11.4
RCIN.BUFFER: P10.1 U11.1 | length 96
  Top Layer w7.87: P10.1 2125.59,3110.59 U11.1
SPI0.CLK: P1.8 U8.5 | length 1041.4
  Top Layer w7.87: P1.8 1240,1450.23 1200.24,1410.47 1200.24,1377.53 1223.53,1354.24 1256.47,1354.24 1293.94,1391.7 1293.94,1550.09 1286.06,1557.96 1286.06,1716.34 1323.96,1754.24 1424.71,1754.24 1550.48,1880 U8.5
SPI0.CS: P1.6 U8.3 | length 768.9
  Top Layer w7.87: P1.6 1279.76,1433.76 1279.76,1510.47 1246.23,1544 1233.77,1544 1200.24,1577.53 1200.24,1710.47 1244,1754.24 1256.47,1754.24 1286.06,1783.83 1286.06,1816.34 1323.96,1854.24 1382.24,1854.24 1458,1930 U8.3
SPI0.MOSI: P1.12 U8.4 | length 356
  Top Layer w7.87: P1.12 1300.24,1754.24 1300.24,1810.47 1323.53,1833.76 1409.81,1833.76 1421.2,1845.15 1423.15,1845.15 1458,1880 U8.4
SPI1.CLK: P2.29 U1.24 U10.4 | length 1170
  Top Layer w7.87: U1.24 1835.75,2259.84 1889.15,2259.84 1975.49,2346.18 U10.4 2024.96,2343.23 2030.58,2343.23 2042.09,2331.72 2042.09,2281.11 2070.92,2252.28 2099.08,2252.28 2150.47,2303.67 2150.47,2560.71 2223.53,2633.76 2256.47,2633.76 2300.24,2677.53 2300.24,2710.47 2323.53,2733.76 2356.47,2733.76 2379.76,2710.47 2379.76,2633.76 P2.29
SPI1.CS0: P2.30 U10.2 | length 571.5
  Top Layer w7.87: U10.2 2019.06,2295 2010.59,2286.54 2007.93,2286.54 2001.93,2280.54 2001.93,2258.28 2022.1,2238.11 2104.95,2238.11 2164.64,2297.8 2164.64,2518.64 P2.30
SPI1.CS1: P2.31 U1.22 | length 1366
  Top Layer w7.87: U1.22 1804.25,2227.63 1824.01,2207.87 2197.64,2207.87 2232.47,2242.7 2244.94,2242.7 2294.47,2292.23 2294.47,2304.7 2330.88,2341.12 2343.35,2341.12 2379.76,2377.53 2379.76,2410.47 2356.47,2433.76 2323.53,2433.76 2290,2400.23 2290,2387.77 2250.17,2347.94 2209.78,2347.94 2186.06,2371.66 2186.06,2496.3 2233.77,2544 2246.23,2544 2286.06,2583.83 2286.06,2640.06 P2.31
SPI1.MISO: P2.27 U1.9 U10.5 | length 1669.8
  Top Layer w7.87: U1.9 1804.25,2396.58 1794.37,2406.46 1751.14,2406.46 1704.17,2359.49 1704.17,2269.01 1783.18,2190 v2(1905,2190) ; v2(1905,2330) 1952.48,2377.48 2050.75,2377.48 2082.05,2346.18 U10.5 2085,2515.71 2223.53,2654.24 2256.47,2654.24 2286.06,2683.83 2286.06,2716.34 2317.66,2747.94 2362.34,2747.94 2393.94,2716.34 2393.94,2591.7 2340,2537.77 P2.27
  Bottom Layer w7.87: v2(1905,2190) v2(1905,2330)
SPI1.MOSI: P2.25 U1.23 U10.3 | length 801
  Top Layer w7.87: U1.23 1820,2231.92 1829.88,2222.05 1875.19,2222.05 ; U10.3 1973.74,2320.59 1875.19,2222.05 ; P2.25 2279.76,2333.76 2243.4,2333.76 2223.53,2333.76 2111.81,2222.05 1875.19,2222.05
USB1.D+: J1.3 P1.11 U4.1 | length 1004.7
  Top Layer w7.87: P1.11 1486.54,1694 1707.91,1472.63 1707.91,1333.38 1718.82,1322.48 J1.3 ; U4.1 1578.26,1180.32 1599.25,1159.33 1692.63,1159.33 1712.8,1179.5 1712.8,1184.13 1720.28,1191.61 J1.3@1720.28,1210.32
USB1.D-: J1.2 P1.9 U4.2 | length 910.8
  Top Layer w7.87: P1.9 1376.05,1557.95 1602.55,1557.95 1693.23,1467.27 J1.2 ; U4.2 1578.62,1200 1605.12,1173.5 1681.21,1173.5 1687.2,1179.5 1687.2,1184.13 1694.68,1191.61 J1.2@1694.68,1210.32
VIN: C5.2 J1.1 L2.2 P1.1 U4.6 U5.5 U7.3 U8.6 | length 3884.5
  Top Layer w7.87: P1.1 P1.1@1341.85,1192.15 ; C5.2 P1.1@1341.85,1192.15 ; P1.1@1354,1180 P1.1@1341.85,1192.15 ; 1420,1180 1422.47,1180 ; U4.6 1456.23,1182.27 1456.23,1181.98 1454.25,1180 1422.47,1180 ; L2.2 1579.69,1252.67 1562.84,1235.83 ; J1.1@1669.09,1210.32 1669.09,1192.2 1665.16,1188.27 1610.4,1188.27 1562.84,1235.83 ; U8.6 1708,1930 1729.24,1951.24 1729.24,1995.24 1715.71,2008.76 1636.76,2008.76 1591.29,2054.24 1323.53,2054.24 1300.24,2077.53 1300.24,2210.47 1323.53,2233.76 1641.28,2233.76 2104.77,1770.28 2104.77,1715 2112.37,1707.4 U5.5 2120.91,1683.43 2141.69,1662.65 2142.63,1662.65 2163.4,1641.88 2163.4,1379.44 2140.26,1356.3 2096.35,1356.3 2078.24,1374.41 U7.3 2031.69,1355.91 2036.31,1351.3 2055.23,1351.3 2070.66,1335.88 2089.62,1335.88 2110,1315.5 2110,1268.53 2050.24,1208.77 2050.24,1179 1933.28,1062.05 1540.42,1062.05 1422.47,1180 ; 1422.47,1180 1422.47,1209.91 1448.39,1235.83 1562.84,1235.83
  Top Layer w20: P1.1@1354,1180 1420,1180
VOUT: C9.2 P1.24 P2.13 P8.1 P10.2 | length 93.3
  Bottom Layer w7.87: P2.13 2422.15,1794 C9.2
pads on no net: J1.4 J1.6 J1.7 J1.8 J1.9 J1.10 J1.11 P1.2 P1.3 P1.4 P1.5 P1.7 P1.10 P1.13 P1.15 P1.16 P1.17 P1.18 P1.20 P1.22 P1.23 P1.25 P1.26 P1.27 P1.28 P1.30 P1.32 P1.34 P1.35 P1.36 P2.1 P2.2 P2.3 P2.4 P2.5 P2.6 P2.7 P2.8 P2.10 P2.12 P2.14 P2.15 P2.16 P2.17 P2.19 P2.20 P2.21 P2.22 P2.23 P2.24 P2.28 P2.33 P2.35 P2.36 P3.2 P4.2 P5.2 P6.2 P7.2 P9.2 U1.2 U1.3 U1.4 U1.5 U1.6 U1.7 U1.12 U1.13 U1.14 U1.15 U1.16 U1.17 U1.19 U1.21 U1.25 U4.3 U4.5 U8.1 U9.2

## Polygon pours and split planes (outlines as drawn)
VOUT on Top Layer "TOPPLANE" (solid, pour order 1): 1400,3400 2170,3400 cw(c2170,3095) 2475,3095 2475,990 1105,990 1105,3105 cw(c1400,3105)
GND on Bottom Layer "BOTTOMPLANE" (solid, pour order 2): 1400,3400 2170,3400 cw(c2170,3090) 2480,3090 2480,1140 cw(c2330,1140) 2330,990 1240,990 cw(c1240,1130) 1100,1130 1100,3100 cw(c1400,3100)

## Keep-outs
Keep-Out Layer:
  lines w10: 1100.01,1131.66 ccw(c1241.68,1131.66) 1241.68,990 2331.58,990 ccw(c2331.58,1138.42) 2480,1138.42 2480,2780 2480,2947.92 2480,3088.62 ccw(c2167.62,3088.62) 2167.62,3401 1401.69,3401 ccw(c1401.69,3101.44) 1102.14,3101.44 1102.14,3090.03 1100.01,1131.66

## Text inside footprints (layer, text, board x,y; h text height)
P2: Top Overlay "2" at 2250,1120 h15 r90; Top Overlay "1" at 2350,1125 h15 r90
U8: Mechanical 13 "*" at 1507,2000.5 h50